# Altium PCB 5V-Reg.PcbDoc
Units mil, origin at the board's own origin, x right, y up, seen from the top; angles counter-clockwise.
Board outline 2940 x 700 mil, 2 copper layers (Top Layer, Bottom Layer); 8 components, 4 nets, 17 pads, 0 vias.
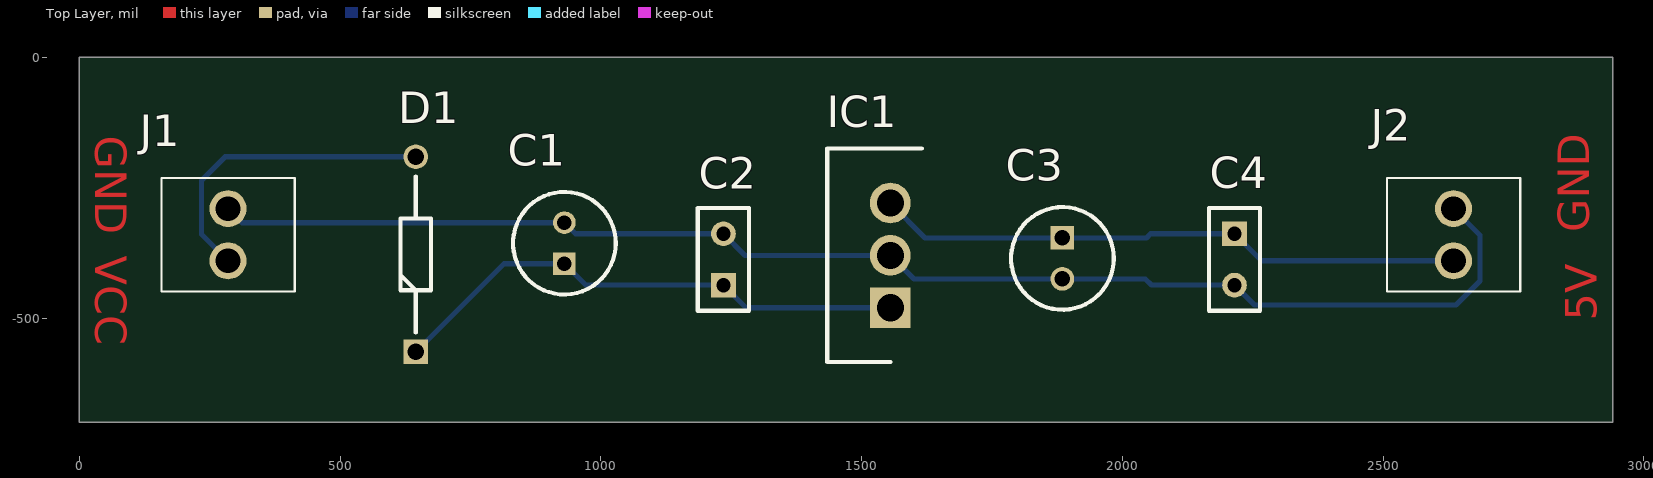
[diagram p0: Top Layer view]
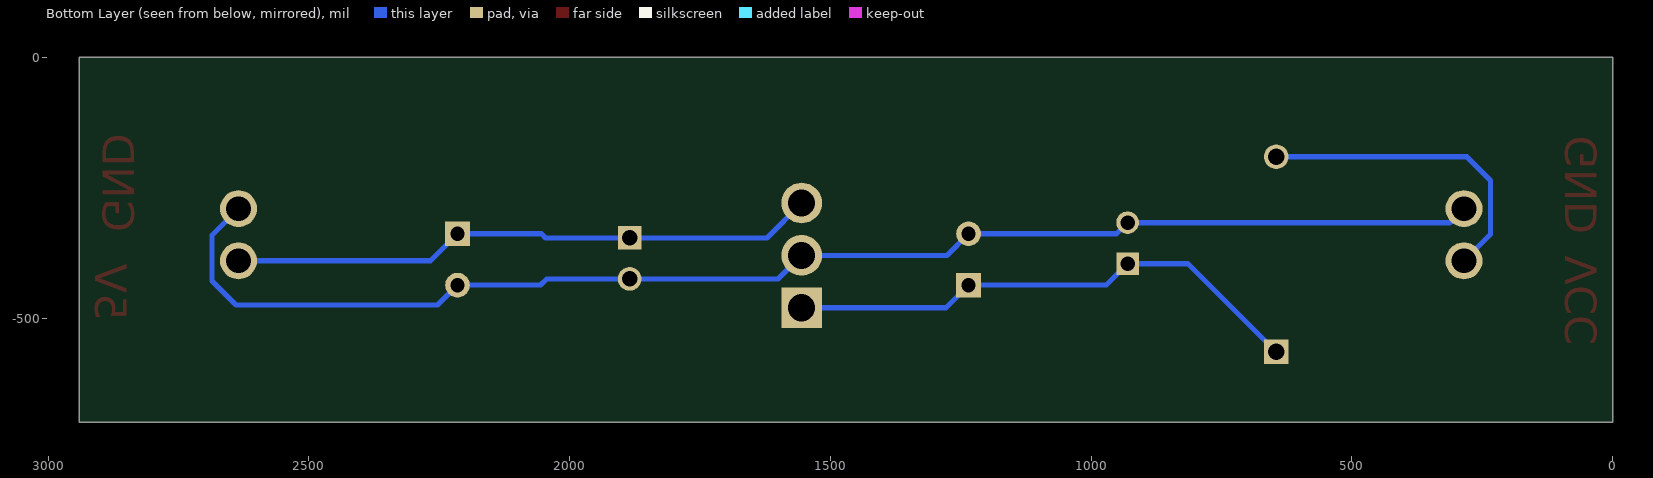
[diagram p1: Bottom Layer view, seen from below]
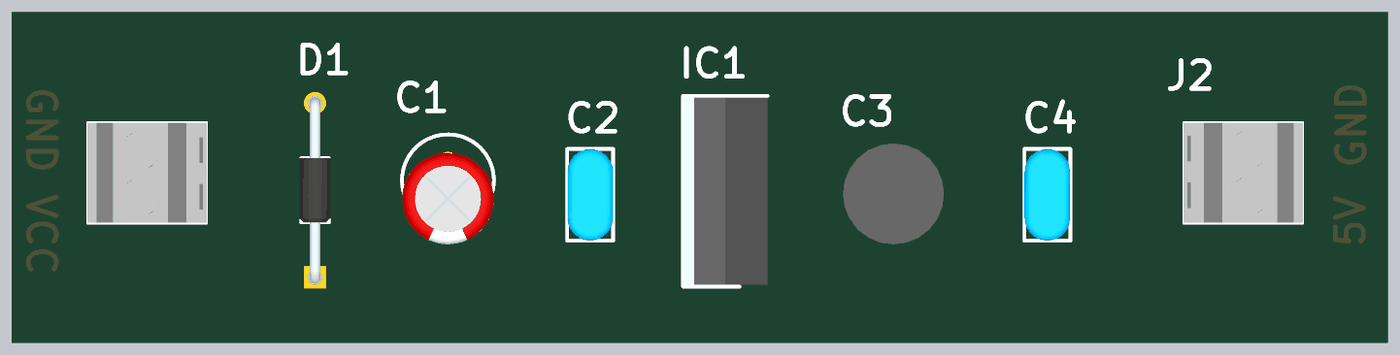
[diagram p2: 3D render of the assembled board from above, using the file's embedded part models]

## Layer stack, top to bottom
Top Solder: solder mask 0.4, Solder Resist, Dk 3.5
Top Layer: signal copper 1.4
Dielectric 1: dielectric 12.6, FR-4, Dk 4.8
Bottom Layer: signal copper 1.4
Bottom Solder: solder mask 0.4, Solder Resist, Dk 3.5

## Board outline
0,-700 0,0 2940,0 2940,-700

## Design rules (kind name [scope] priority, off if disabled: settings)
Clearance [All] p1: gap=10 ignorepadtopadclearanceinfootprint=FALSE
PolygonConnect [All] p1: connectstyle=Relief reliefconductorwidth=10 reliefentries=4 polygonreliefangle="90 Angle" airgapwidth=10
RoutingVias [All] p1: holewidth=28 width=50 viastyle="Through Hole" minholewidth=28 minwidth=50 maxholewidth=28 maxwidth=50
SilkToSolderMaskClearance [IsPad] p1: minsilkscreentomaskgap=5 clearancetoexposedcopper=TRUE
SolderMaskExpansion [All] p1: expansion=0 istentingtop=FALSE
SupplyNets "Schematic Supply Nets_2" [InNet('GND')] p1: voltage=0.000
SupplyNets "Schematic Supply Nets_1" [InNet('VCC')] p2: voltage=0.000
SupplyNets "Schematic Supply Nets" [InNet('5V')] p3: voltage=0.000
Width [All] p1: maxlimit=10 minlimit=10 preferedwidth=10
29 further rules are at their usual default settings.

## Components (designator, comment, footprint, x,y, rotation, side; value= is the part's Value field where it differs from the comment)
C1 "22 uF" CAPPRD200W52D500H1250 930,-395.63 r90 top
C2 "0.1 uF" FP-RDE0P1-MFG 1235,-387.36 r90 top
C3 "10 uF" CAPPRD200W55D500H1250 1885,-346.02 r270 top
C4 "0.1 uF" FP-RDE0P1-MFG 2215,-387.36 r270 top
D1 "SD103A-TR" DIOAD950W60L350D150 645,-564.65 r90 top
IC1 "L7805CV" TO255P460X1020X2008-3P 1555,-480 r90 top
J1 "1546215-2" 15462152 285,-290 r270 top
J2 "1546215-2" 15462152 2635,-390 r90 top

## Footprints (in the part's own frame and the unit in brackets; to place one, negate y for a bottom-side part, rotate by r counter-clockwise, add the part's x,y. Pads: shape width x height; smd on the part's side, far side on the other; paste and mask are expansions set on the pad)
15462152 [mm]
  round 1.8 hole 1.2: 1(0,0) 2(2.54,0)
  silkscreen extent -1.5,-3.25 4.04,3.25, body extent -1.46,-3.25 4,3.25, height 9.91
CAPPRD200W52D500H1250 [mm]
  rect 1.1x1.1 hole 0.7: 1(0,0)
  round 1.1 hole 0.7: 2(2,0)
  silkscreen extent -1.5,-2.5 3.5,2.5, body extent -2.49,-2.5 2.5,2.5, height 10.89
CAPPRD200W55D500H1250 [mm]
  rect 1.15x1.15 hole 0.75: 1(0,0)
  round 1.15 hole 0.75: 2(2,0)
  silkscreen extent -1.5,-2.5 3.5,2.5, body extent -1.74,-2.75 3.75,2.75, height 12.5
DIOAD950W60L350D150 [mm]
  rect 1.2x1.2 hole 0.8: 1(0,0)
  round 1.2 hole 0.8: 2(9.5,0)
  silkscreen extent 0.95,-0.75 8.55,0.75, body extent -0.3,-0.84 9.8,0.84, height 1.7
FP-RDE0P1-MFG [mm]
  rect 1.2x1.2 hole 0.7 paste-2539.97 mask+0: 1(-1.25,0)
  round 1.2 hole 0.7 paste-2539.97 mask+0: 2(1.25,0)
  silkscreen extent -2.5,-1.25 2.5,1.25, body extent -2.6,-1.35 2.6,1.35, height 0.25
TO255P460X1020X2008-3P [mm]
  rect 1.98x1.98 hole 1.32: 1(0,0)
  round 1.98 hole 1.32: 2(2.55,0) 3(5.1,0)
  silkscreen extent -2.65,-1.53 7.75,3.07, body extent -2.55,-1.53 7.65,3.07, height 20.08

## Part data
C1: library part 860010772002, "Capacitor Polarised", Manufacturer_Name="Wurth Elektronik", Mouser Part Number=710-860010772002, Datasheet Link=https://componentsearchengine.com/Datasheets/1/860010772002.pdf, Height=12.5mm, Manufacturer_Part_Number=860010772002, Mouser Price/Stock=https://www.mouser.co.uk/ProductDetail/Wurth-Elektronik/860010772002?qs=0KOYDY2FL2%2FXueoM4QQtRg%3D%3D
C2 C4: library part CMP-06035-036375-1, "Ceramic Capacitor 100nF ±10% 25V X7R Radial", Capacitance=100nF, Case/Package=Radial, Dielectric=X7R, Max Operating Temperature=125°C, Min Operating Temperature=-55°C, Package Quantity=500, Resistor Type=Ceramic, Tolerance=10%, Voltage Rating=25V, Height=3.5mm, Height - Seated (Max)=0.236inch, Lead Diameter=0.5mm, Lead Free="Lead Free", Lead Pitch=0.098inch, Length=0.197inch, Mount="Through Hole", Packaging=Bulk, Termination=Radial, Voltage Rating (DC)=25V, Width=0.098inch
C3: library part EEU-FR1H100, "Capacitor Polarised", Manufacturer_Name=Panasonic, Mouser Part Number=667-EEU-FR1H100, Datasheet Link=http://industrial.panasonic.com/cdbs/www-data/pdf/RDF0000/ABA0000C1259.pdf, Height=12.5mm, Manufacturer_Part_Number=EEU-FR1H100, Mouser Price/Stock=https://www.mouser.co.uk/ProductDetail/Panasonic/EEU-FR1H100?qs=tfZGHB2PWd1NAbdNSgjToQ%3D%3D
D1: "Schottky Diode", Manufacturer_Name=Vishay, Mouser Part Number=625-SD103A, Arrow Part Number=SD103A-TR, Arrow Price/Stock=https://www.arrow.com/en/products/sd103a-tr/vishay?utm_currency=USD&region=nac, Datasheet Link=https://componentsearchengine.com/Datasheets/5/SD103A-TR.pdf, Manufacturer_Part_Number=SD103A-TR, Mouser Price/Stock=https://www.mouser.co.uk/ProductDetail/Vishay-Semiconductors/SD103A-TR?qs=RwahMLkpD2urFD%2FzZdGOBw%3D%3D
IC1: "Integrated Circuit", Manufacturer_Name=STMicroelectronics, Mouser Part Number=511-L7805CV, Arrow Part Number=L7805CV, Arrow Price/Stock=https://www.arrow.com/en/products/l7805cv/stmicroelectronics.html?utm_currency=USD&region=europe, Datasheet Link=https://www.st.com/resource/en/datasheet/l78.pdf, Height=4.6mm, Manufacturer_Part_Number=L7805CV, Mouser Price/Stock=https://www.mouser.co.uk/ProductDetail/STMicroelectronics/L7805CV?qs=9NrABl3fj%2FqplZAHiYUxWg%3D%3D
J1 J2: "Connector", Manufacturer_Name="TE Connectivity", Mouser Part Number=571-1546215-2, Arrow Part Number=1546215-2, Arrow Price/Stock=https://www.arrow.com/en/products/1546215-2/te-connectivity?utm_currency=USD&region=nac, Datasheet Link=https://www.te.com/commerce/DocumentDelivery/DDEController?Action=srchrtrv&DocNm=1-1773458-1_EURO_STYLE_QRG&DocType=Data%20Sheet&DocLang=English&PartCntxt=1546215-2&DocFormat=pdf, Height=10.3mm, Manufacturer_Part_Number=1546215-2, Mouser Price/Stock=https://www.mouser.co.uk/ProductDetail/TE-Connectivity/1546215-2?qs=Lxq28tKK6BPmJFoAOY7Ljw%3D%3D

## Nets (pads, with @x,y where several pads share a name; then routed paths per layer and width w, separated by ;. In a path a pad name is that pad's centre, name@x,y a point inside that pad or via, vN(x,y) a via of type N, cw(c..) or ccw(c..) an arc to the next point about the centre after c; other vN are vias at no path point)
5V: C3.1 C4.1 IC1.3 J2.1 | length 1132.4
  Bottom Layer w10: IC1.3 1621.81,-346.02 C3.1 2046,-346.02 2053.87,-338.15 C4.1 2266.85,-390 J2.1
GND: C1.2 C2.2 C3.2 C4.2 IC1.2 J1.1 J2.2 | length 2656.8
  Bottom Layer w10: J1.1 311.89,-316.89 C1.2 951.26,-338.15 C2.2 1276.46,-379.61 IC1.2 1600.16,-424.76 C3.2 2044,-424.76 2055.81,-436.57 C4.2 2253.43,-475 2640,-475 2686,-429 2686,-341 J2.2
NetC1_1: C1.1 C2.1 D1.1 IC1.1 | length 1015
  Bottom Layer w10: D1.1 814.02,-395.63 C1.1 970.94,-436.57 C2.1 1278.43,-480 IC1.1
VCC: D1.2 J1.2 | length 604.9
  Bottom Layer w10: J1.2 234,-339 234,-236 279.37,-190.63 D1.2

## Other copper
Top Layer:
  text "GND" at 30,-150 h60 r270
  text "GND" at 2895,-335 h60 r90
  text "VCC" at 30,-380 h60 r270
  text "5V" at 2910,-505 h60 r90

## Silkscreen, mask and mechanical layers (free items; w line width, h text height)
CUTOUT:
  the board outline again, w10